# Altium PCB TASK1.2_PCB.PcbDoc
Units mil, origin at the board's own origin, x right, y up, seen from the top; angles counter-clockwise.
Board outline 1500 x 568 mil, 2 copper layers (Top Layer, Bottom Layer); 21 components, 9 nets, 40 pads, 146 vias.
Unrouted connection lines stored in the file: 8.
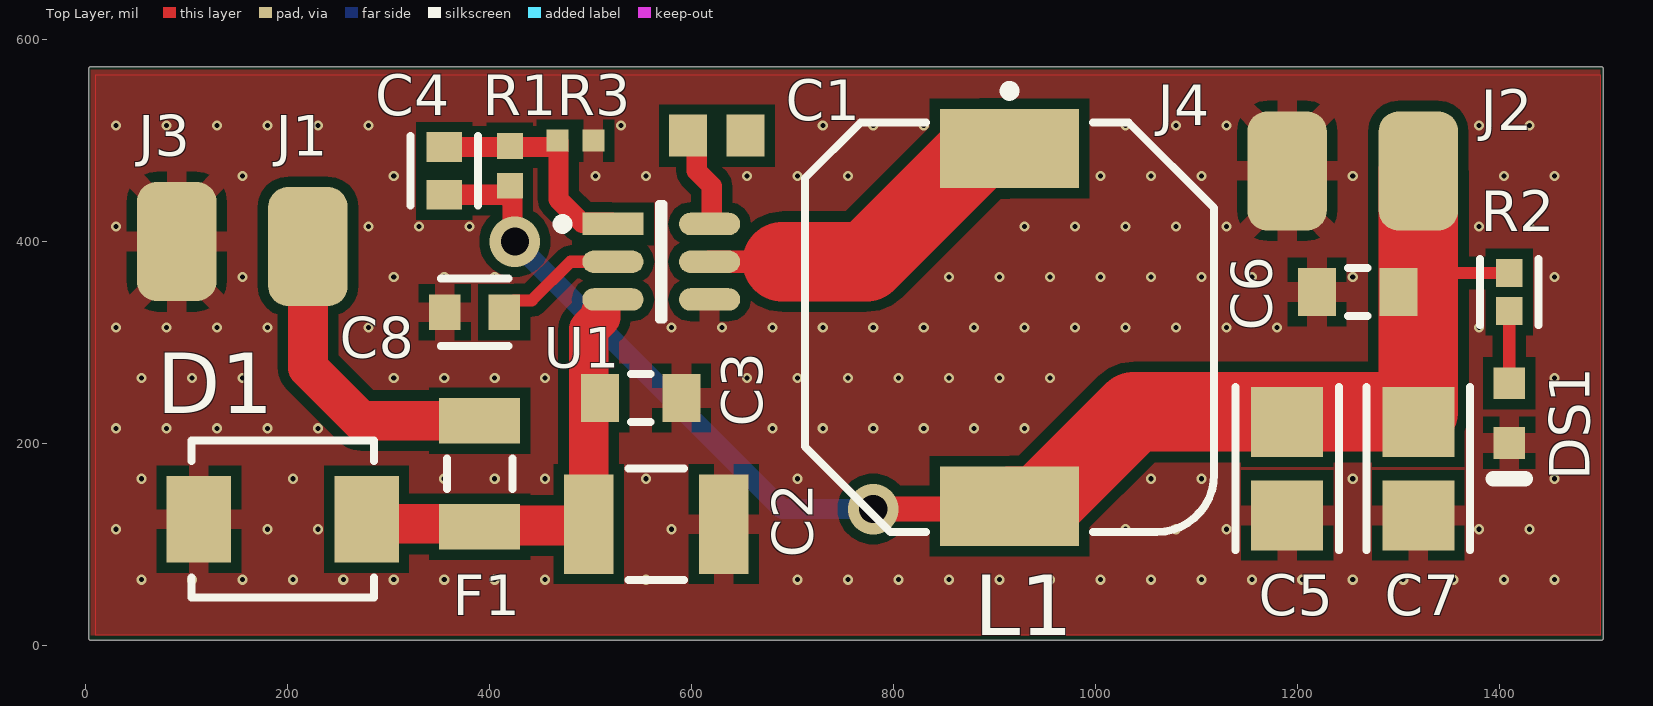
[diagram p0: Top Layer view]
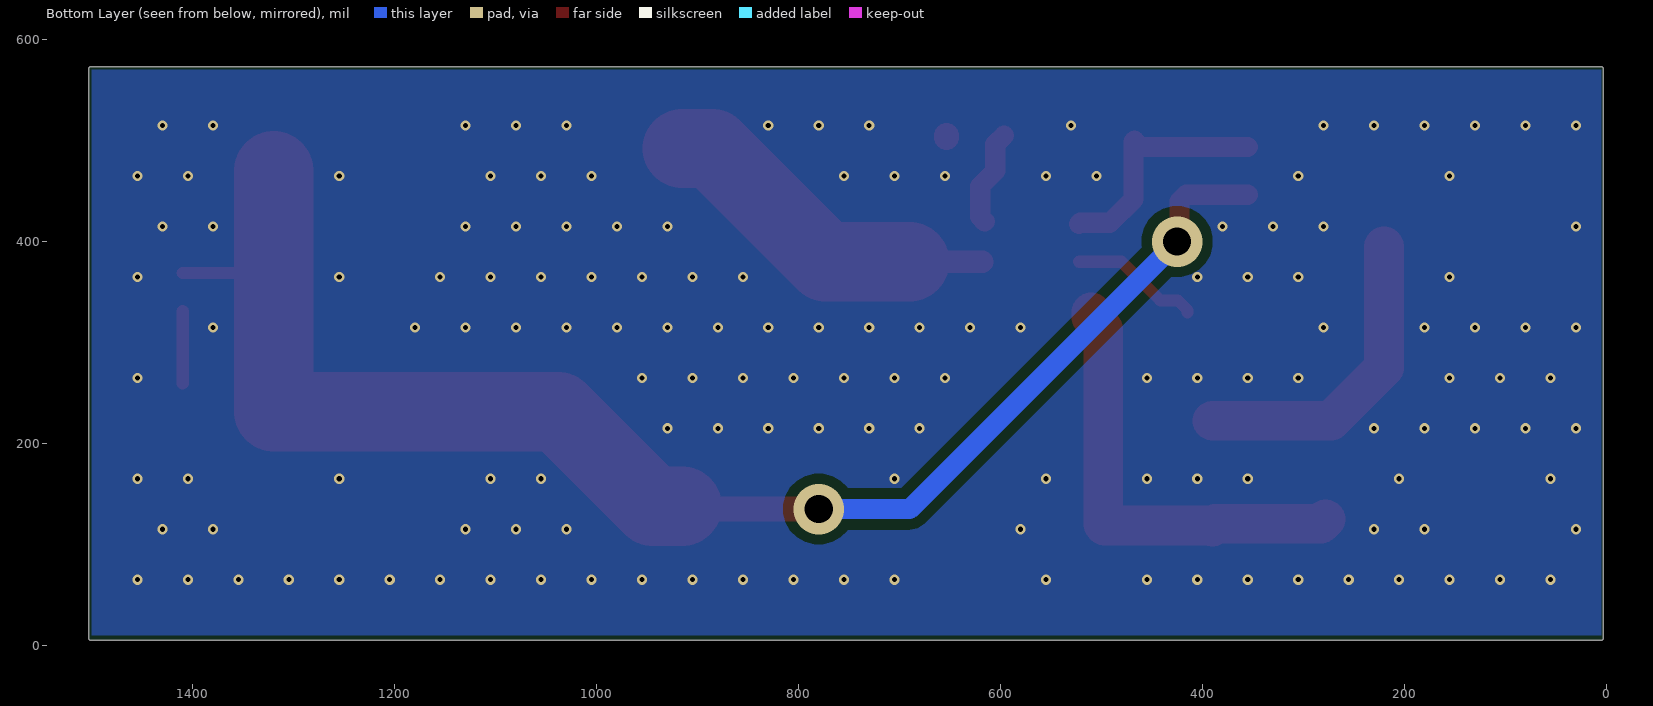
[diagram p1: Bottom Layer view, seen from below]
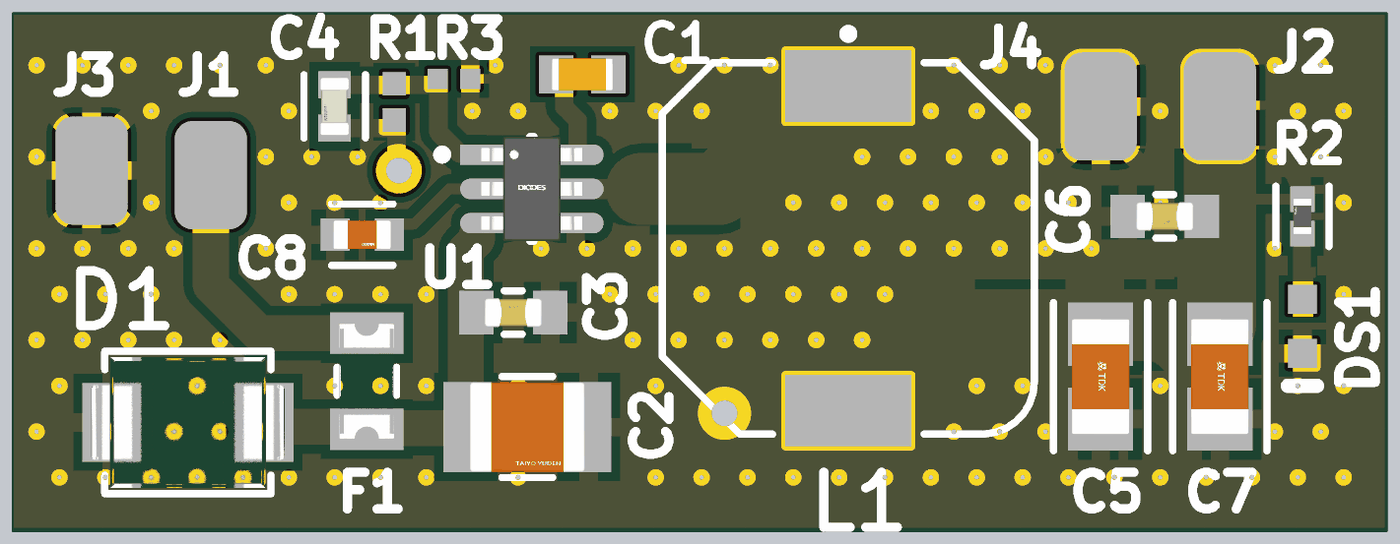
[diagram p2: 3D render of the assembled board from above, using the file's embedded part models]

## Layer stack, top to bottom
Top Solder: solder mask 0.4, Solder Resist, Dk 3.5
Top Layer: signal copper 1.4
Dielectric 1: dielectric 12.6, FR-4, Dk 4.8
Bottom Layer: signal copper 1.4
Bottom Solder: solder mask 0.4, Solder Resist, Dk 3.5

## Board outline
3,6 3,572 4,573 1502,573 1503,572 1503,6 1502,5 4,5

## Design rules (kind name [scope] priority, off if disabled: settings)
AssemblyTestPointUsage [All] p1: isadvanced=TRUE
AssemblyTestpoint [All] p1: isadvanced=TRUE testpointundercomponent=TRUE minsize=40 maxsize=100 preferedsize=60 minholesize=0 maxholesize=40 preferedholesize=32 testpointgrid=1 usegrid=TRUE gridtolerance=0.01 allowsidetop=TRUE allowsidebottom=TRUE
Clearance Clearance_1 [OnMid vs OnMid] p1: gap=10 ignorepadtopadclearanceinfootprint=FALSE sourcerule=39 cellrowname=All cellrowtype=0 cellcolname=All cellcoltype=0 innerlayers=TRUE
Clearance Clearance_2 [(ExistsOnLayer('Top Layer') Or ExistsOnLayer('Bottom Layer')) vs (ExistsOnLayer('Top Layer') Or ExistsOnLayer('Bottom Layer'))] p2: gap=10 ignorepadtopadclearanceinfootprint=FALSE sourcerule=39 cellrowname=All cellrowtype=0 cellcolname=All cellcoltype=0 outerlayers=TRUE
Clearance [All] p3: gap=10 ignorepadtopadclearanceinfootprint=FALSE ismatrix=TRUE
ComponentClearance [All] p1: isadvanced=TRUE gap=10 collisioncheckmode=3 verticalgap=10 showdistances=FALSE
FabricationTestPointUsage [All] p1: isadvanced=TRUE valid=0 allowmultiple=FALSE
FabricationTestpoint [All] p1: isadvanced=TRUE side=3 testpointundercomponent=TRUE minsize=40 maxsize=100 preferedsize=60 minholesize=0 maxholesize=40 preferedholesize=32 testpointgrid=1 allowsidetop=TRUE allowsidebottom=TRUE usegrid=TRUE gridtolerance=0.01
FanoutControl Fanout_BGA [IsBGA] p1: isadvanced=TRUE bgadir=Out bgaviamode=Centered fanoutstyle=Auto fanoutdirection=Alternating viagrid=1 // Fanout_BGA (Default Rule)
FanoutControl Fanout_LCC [IsLCC] p2: isadvanced=TRUE bgadir=Out bgaviamode=Centered fanoutstyle=Auto fanoutdirection=Alternating viagrid=1 // Fanout_LCC (Default Rule)
FanoutControl Fanout_SOIC [IsSOIC] p3: isadvanced=TRUE bgadir=Out bgaviamode=Centered fanoutstyle=Auto fanoutdirection=Alternating viagrid=1 // Fanout_SOIC (Default Rule)
FanoutControl Fanout_Small [(CompPinCount < 5)] p4: isadvanced=TRUE bgadir=Out bgaviamode=Centered fanoutstyle=Auto fanoutdirection=OutThenIn viagrid=1 // Fanout_Small (Default Rule)
FanoutControl Fanout_Default [All] p5: isadvanced=TRUE bgadir=Out bgaviamode=Centered fanoutstyle=Auto fanoutdirection=Alternating viagrid=1 // Fanout_Default (Default Rule)
Height [All] p1: isadvanced=TRUE minheight=0 maxheight=1000 prefheight=500
HoleSize [All] p1: isadvanced=TRUE absolutevalues=TRUE maxlimit=100 minlimit=1 maxpercent=80.000 minpercent=20.000
HoleToHoleClearance [All] p1: isadvanced=TRUE gap=10 allowstackedmicrovias=TRUE
LayerPairs [All] p1: isadvanced=TRUE enforce=TRUE
MinimumSolderMaskSliver [All] p1: isadvanced=TRUE minsoldermaskwidth=10
NetAntennae [All] p1: isadvanced=TRUE netantennaetolerance=0
PasteMaskExpansion [All] p1: isadvanced=TRUE expansion=0
PlaneClearance [All] p1: isadvanced=TRUE clearance=18
PlaneConnect [All] p1: isadvanced=TRUE planeconnectstyle=Relief reliefexpansion=20 reliefentries=4 reliefconductorwidth=10 reliefairgap=10
PolygonConnect PolygonConnectStyle_1 [InNet('NetC4_1')] p1: thpad.connectstyle=Direct thpad.reliefconductorwidth=20 thpad.reliefentries=4 thpad.polygonreliefangle="90 Angle" thpad.airgapwidth=15 smdpad.connectstyle=Direct smdpad.reliefconductorwidth=20 smdpad.reliefentries=4 smdpad.polygonreliefangle="90 Angle" smdpad.airgapwidth=10 via.connectstyle=Relief via.reliefconductorwidth=20 via.reliefentries=4 via.polygonreliefangle="90 Angle" via.airgapwidth=5
PolygonConnect PolygonConnectStyle_2 [InNet('GND')] p2: thpad.connectstyle=Relief thpad.reliefconductorwidth=20 thpad.reliefentries=4 thpad.polygonreliefangle="90 Angle" thpad.airgapwidth=15 smdpad.connectstyle=Relief smdpad.reliefconductorwidth=20 smdpad.reliefentries=4 smdpad.polygonreliefangle="90 Angle" smdpad.airgapwidth=10 smdpad.conductorbypadedge=TRUE smdpad.mindistance=15 smdpad.enablemindistance=FALSE via.connectstyle=Direct via.reliefconductorwidth=20 via.reliefentries=4 via.polygonreliefangle="90 Angle" via.airgapwidth=5
PolygonConnect [All] p3: thpad.connectstyle=Relief thpad.reliefconductorwidth=20 thpad.reliefentries=4 thpad.polygonreliefangle="90 Angle" thpad.airgapwidth=15 smdpad.connectstyle=Relief smdpad.reliefconductorwidth=20 smdpad.reliefentries=4 smdpad.polygonreliefangle="90 Angle" smdpad.airgapwidth=10 via.connectstyle=Relief via.reliefconductorwidth=20 via.reliefentries=4 via.polygonreliefangle="90 Angle" via.airgapwidth=5
RoutingCorners [All] p1: isadvanced=TRUE cornerstyle=45-Degree minsetback=100 maxsetback=100
RoutingPriority [All] p1: isadvanced=TRUE routingpriority=0
RoutingVias [All] p1: holewidth=28 width=50 viastyle="Through Hole" minholewidth=28 minwidth=50 maxholewidth=28 maxwidth=50
ShortCircuit [All] p1: isadvanced=TRUE allowed=FALSE
SilkToSilkClearance [All] p1: isadvanced=TRUE silktosilkclearance=10
SilkToSolderMaskClearance [IsPad] p1: isadvanced=TRUE minsilkscreentomaskgap=10 clearancetoexposedcopper=TRUE
SolderMaskExpansion [All] p1: isadvanced=TRUE expansion=4 istentingtop=FALSE
SupplyNets "Schematic Supply Nets" [InNet('GND')] p1: isadvanced=TRUE voltage=0.000
UnRoutedNet [All] p1: isadvanced=TRUE
UnpouredPolygon [All] p1: isadvanced=TRUE
Width [All] p1 off: maxlimit=10 minlimit=10 preferedwidth=10
4 further rules are at their usual default settings.

## Classes and differential pairs
component class TASK1.2_SCH: C2 C3 C4 C5 C6 C7 C8 D1 F1 J1 J2 J3 J4 R2 U1

## Components (designator, comment, footprint, x,y, rotation, side; value= is the part's Value field where it differs from the comment)
C1 "100nF 50V X7R" CAPC1608X90X35ML10T15 625,505 r0 top
C2 "10uF 50V X7R" FP-MK325A-MFG 565,120 r0 top
C3 "100n 50V X7R" FP-CGA3E-0_3-0_1-IPC_A 549.65,245 r0 top
C4 "56pF 50V C0G" FP-C0603C-CF-MFG 355,470 r90 top value="56 pF"
C5 "22uF 25V X5R" FP-C3216-160-0_2-IPC_B 1190,175 r270 top
C6 "100n 50V X7R" FP-CGA3E-0_3-0_1-IPC_A 1260,350 r180 top
C7 "22uF 25V X5R" FP-C3216-160-0_2-IPC_B 1320,175 r270 top
C8 "22nF 50V X7R" FP-CC0603-DA-MFG 385,330 r180 top
D1 "SMBJ33CA-TR" FP-SMB-CA-MFG 195,125 r0 top
DS1 "HSMS-C190" AVAG-HSMX-C190_V 1410,230 r270 top
F1 "0468001.NR" FP-0468-MFG 390,170 r270 top value=0.079Ω
J1 "" "SMD PAD 3x2mm" 240,425 r180 top
J2 "" "SMD PAD 3x2mm" 1340,500 r180 top
J3 "" "SMD PAD 3x2mm" 70,370 r0 top
J4 "" "SMD PAD 3x2mm" 1210,500 r180 top
L1 "7447714068" WE-PD_1050P 915,315 r0 top
R1 "158k 1%" RESC1005X40X25ML05T05 420,475 r270 top
R2 "1k 1%" FP-RC0402-0_4-IPC_A 1410,350 r90 top
R3 "30.1k 1%" RESC1005X35X20NL05T10 485,500 r180 top
U1 "AP63300WU-7" FP-TSOT26-IPC_A 570,380 r0 top
? "Comment" PCBComponent_1 585,-265 r0 top

## Footprints (in the part's own frame and the unit in brackets; to place one, negate y for a bottom-side part, rotate by r counter-clockwise, add the part's x,y. Pads: shape width x height; smd on the part's side, far side on the other; paste and mask are expansions set on the pad)
AVAG-HSMX-C190_V [mm] "SMD, 2-Leads, Body 1.6x0.8mm, Height 0.9mm"
  rect 0.8x0.8 smd: 1(-0.75,0) 2(0.75,0)
  silkscreen extent 1.65,-0.4 1.65,0.4, body extent -0.8,-0.4 0.8,0.4, height 0.9
CAPC1608X90X35ML10T15 [mm] "Chip Capacitor, 2-Leads, Body 1.7x0.9mm, IPC Low Density"
  rect 0.95x1.05 smd: 1(-0.725,0) 2(0.725,0)
  body extent -0.85,-0.45 0.85,0.45, height 0.9
FP-0468-MFG [mil]
  rect 45x80 smd paste+0 mask+0: 1(-52.5,0) 2(52.5,0)
  silkscreen extent -15,-32 15,32, body extent -79,-44 79,44, height 10
FP-C0603C-CF-MFG [mm]
  rect 0.75x0.9 smd paste+0 mask+0: 1(-0.6,0) 2(0.6,0)
  silkscreen extent -0.87,-0.85 0.88,0.85, body extent -1.2,-0.6 1.2,0.6, height 0.25
FP-C3216-160-0_2-IPC_B [mil]
  rect 69.05x71.11 smd paste+0 mask+0: 1(-46.3,0) 2(46.3,0)
  silkscreen extent -81,-51 81,51, body extent -91,-45 91,45, height 10
FP-CC0603-DA-MFG [mm]
  rect 0.8x0.9 smd paste+0 mask+0: 1(-0.75,0) 2(0.75,0)
  silkscreen extent -0.85,-0.85 0.85,0.85, body extent -1.43,-0.82 1.43,0.82, height 0.25
FP-CGA3E-0_3-0_1-IPC_A [mm]
  rect 0.956x1.206 smd paste+0 mask+0: 1(-1.025,0) 2(1.025,0)
  silkscreen extent -0.25,-0.6 0.25,0.6, body extent -2,-1.1 2,1.1, height 0.25
FP-MK325A-MFG [mm]
  rect 1.25x2.5 smd paste+0 mask+0: 1(-1.7,0) 2(1.7,0)
  silkscreen extent -0.7,-1.4 0.7,1.4, body extent -2.42,-1.5 2.42,1.5, height 0.25
FP-RC0402-0_4-IPC_A [mil]
  rect 28.16x26.48 smd paste+0 mask+0: 1(-18.84,0) 2(18.84,0)
  silkscreen extent -33,-29 33,29, body extent -41,-21 41,21, height 10
FP-SMB-CA-MFG [mm]
  rect 1.62x2.18 smd paste+0 mask+0: 1(-2.11,0) 2(2.11,0)
  silkscreen extent -2.3,-1.98 2.3,1.98, body extent -3.02,-2.07 3.02,2.07, height 0.25
FP-TSOT26-IPC_A [mm]
  rect 1.54x0.566 smd paste+0 mask+0: 1(-1.215,0.95)
  rrect100% 1.54x0.566 smd paste+0 mask+0: 2(-1.215,0) 3(-1.215,-0.95) 4(1.215,-0.95) 5(1.215,0) 6(1.215,0.95)
  silkscreen extent -2.61,-1.45 0.05,1.45, body extent -2.49,-1.95 2.49,1.95, height 0.25
PCBComponent_1 [mil]
RESC1005X35X20NL05T10 [mm] "Chip Resistor, 2-Leads, Body 1.00x0.50mm, IPC Medium Density"
  rect 0.55x0.55 smd: 1(-0.45,0) 2(0.45,0)
  body extent -0.53,-0.27 0.53,0.28, height 0.35
RESC1005X40X25ML05T05 [mm] "Chip Resistor, 2-Leads, Body 1.00x0.50mm, IPC Low Density"
  rect 0.65x0.65 smd: 1(-0.5,0) 2(0.5,0)
  body extent -0.53,-0.27 0.53,0.28, height 0.4
"SMD PAD 3x2mm" [mil]
  rrect50% 78.74x118.11 smd: A1(20,30)
WE-PD_1050P [mm] "SMD Shielded Power Inductor, 2-leads, body 10x10mm"
  rect 3.5x2 smd: 1(0,4.5) 2(0,-4.5)
  silkscreen extent -5.15,-5.15 5.15,6.07

## Part data
C1: library part CMP-2100-03643-1, "Chip Capacitor, 0.1 uF, +/- 10%, 50 V, -55 to 125 degC, 0603 (1608 Metric), RoHS, Tape and Reel", Capacitance=100nF, Case Code (Imperial)=0603, Case Code (Metric)=1608, Dielectric=X7R, Dielectric Material=Ceramic, Insulation Resistance=10GR, Manufacturer=Murata, Max Operating Temperature=125degC, Min Operating Temperature=-55degC, Package Description="2-Pin Surface Mount Device, Body 1.6 x 0.8 mm", Package Quantity=1, Tolerance=10%, Voltage=50V, Case/Package=0603, Contact Plating=Tin, Datasheet URL=http://psearch.en.murata.com/capacitor/product/GRM188R71H104KA93%23.pdf, Datasheet Version=42675.0, Depth=0.8mm, Height=0.8mm, Lead Free=LeadFree, Length=1.6mm, Manufacturer URL=http://www.murata.com/, Material=Ceramic, Mount=SurfaceMount, Number of Pins=2, Package Reference=0603, Packaging=TapeandReel, Radiation Hardening=No, REACH SVHC=NoSVHC, RoHSCompliant=true, Termination=SMD/SMT, Thickness=0.035inch, Voltage Rating=50V, Voltage Rating (DC)=50V, Width=0.8mm
C2: library part CMP-14477-002214-1, "CAP CER 10UF 50V X7R 1210", Capacitance=10uF, Case Code (Imperial)=1210, Case Code (Metric)=3225, Max Operating Temperature=125°C, Min Operating Temperature=-55°C, Package Quantity=500, Tolerance=10%, Voltage Rating=50V, Case/Package=1210, Halogen Free="Halogen Free", Lead Free="Lead Free", Length=0.126inch, Mount="Surface Mount", Packaging="Tape and Reel", RoHS Compliant=Yes, Series=M, Termination=SMD/SMT, Thickness=0.11inch, Voltage Rating (DC)=50V, Width=0.098inch
C3 C6: library part CMP-2000-07546-2, "Cap Ceramic 100nF 50V X7R 10% Pad SMD 0603 +125°C Automotive T/R", Capacitance=100nF, Case Code (Imperial)=0603, Case Code (Metric)=1608, Dielectric=X7R, Max Operating Temperature=125°C, Min Operating Temperature=-55°C, Package Quantity=1, Ratings=AEC-Q200, Tolerance=10%, Voltage=50V, Case/Package=0603, Composition=Ceramic, Depth=0.8mm, Height=0.8mm, Lead Free="Lead Free", Length=1.6mm, Mount="Surface Mount", Packaging="Tape and Reel", Radiation Hardening=No, REACH SVHC="No SVHC", Termination=SMD/SMT, Thickness=0.035inch, Voltage Rating=50V, Voltage Rating (DC)=50V, Weight=7.1E-05oz, Width=0.8mm
C4: library part CMP-2006-03385-2, "CAP CER 56PF 50V 1% NP0 0603", Capacitance="56 pF", Manufacturer=KEMET, Manufacturer Part Number=C0603C560F5GACTU, Package=C0603C-CF, Temperature="-55°C to +125°C", Temperature Characteristic=C0G, Temperature Coefficient=30ppm/°C, Temperature Range High=+125°C, Temperature Range Low=-55°C, Tolerance=0.01, Voltage Rating="50 V", Automotive=Yes, Automotive Grade="Grade 1", Category=Cap, ComponentLink2Description=Datasheet, ComponentLink2URL=https://api.kemet.com/component-edge/download/datasheet/C0603C100J5GACAUTO.pdf, Device Class L1="Passive Components", Device Class L2=Capacitors, Device Class L3="Ceramic Capacitors", Digikey Description="CAP CER 56PF 50V 1% NP0 0603", Height=0.87mm, Lead Free=Yes, Material=Ceramic, Mouser Description="Multilayer Ceramic Capacitors MLCC - SMD/SMT 50volts 56pF C0G 1%", Octopart=https://octopart.com/c0603c560f5gactu-kemet-9143760, RoHS=TRUE
C5 C7: library part CMP-08246-004697-1, "Multilayer Ceramic Capacitors 22uF ±20% 25V X5R SMD 1206", Capacitance=22uF, Case Code (Imperial)=1206, Case Code (Metric)=3216, Dielectric=X5R, Dielectric Material=Ceramic, Max Operating Temperature=85°C, Min Operating Temperature=-55°C, Package Quantity=1, Tolerance=20%, Voltage Rating=25V, Case/Package=1206, Construction=Flat, Depth=1.6mm, Height=1.6mm, Lead Free="Lead Free", Length=3.2mm, Mount="Surface Mount", Packaging="Tape and Reel", REACH SVHC="No SVHC", Resistor Type=Ceramic, RoHS Compliant=Yes, Series=C, Termination=SMD/SMT, Thickness=0.071inch, Voltage Rating (DC)=25V, Weight=0.000571oz, Width=0.063inch
C8: library part CMP-2100-03602-3, "CAP CER 0.022UF 50V X7R 0603", Capacitance=22nF, Case Code (Imperial)=0603, Case Code (Metric)=1608, Dielectric=X7R, Dielectric Material=Ceramic, Insulation Resistance=100GR, Max Operating Temperature=125°C, Min Operating Temperature=-55°C, Package Quantity=1, Tolerance=10%, Voltage=50V, Case/Package=0603, Depth=0.8mm, Halogen Free="Halogen Free", Height=0.8mm, Lead Free="Lead Free", Length=1.6mm, Mount="Surface Mount", Number of Pins=2, Packaging="Tape and Reel", Radiation Hardening=No, REACH SVHC="No SVHC", Resistor Type=Ceramic, RoHS Compliant=Yes, Series=CC, Termination=SMD/SMT, Thickness=0.035inch, Voltage Rating=50V, Voltage Rating (DC)=50V, Width=0.031inch
D1: library part CMP-12225-000040-1, "TVS DIODE 33V 69.7V SMB", Breakdown Voltage=36.7V, Clamping Voltage=53.3V, Manufacturer=STMicroelectronics, Max Junction Temp=+150°C, Package=SMB-CA, Peak Pulse Current=11.8A, Peak Pulse Power=600W, Reverse Standoff Voltage=33V, Temperature="-55°C to +150°C", Temperature Range Low=-55°C, Automotive=No, Category=Diode, ComponentLink2Description=Datasheet, ComponentLink2URL=https://www.st.com/resource/en/datasheet/smbj.pdf, Device Class L1="Circuit Protection", Device Class L2="TVS Diodes", Device Class L3=unset, Digikey Description="TVS DIODE 33V 69.7V SMB", Direction=Bidirectional, Height=2.65mm, Lead Free=Yes, Manufacturer Part Number=SMBJ33CA-TR, Mouser Description="TVS Diodes - Transient Voltage Suppressors 600W 33V Bidirect", Number Of Channels=1, Octopart=https://octopart.com/smbj33ca-tr-stmicroelectronics-347069, RoHS=TRUE, Standoff Height=0.05mm, Temperature Range High=+150°C
DS1: library part CMP-2000-06427-1, "LED Uni-Color Red, 52 mW, 20 mA, -40 to 85 degC, 2-Pin SMD, RoHS, Tape and Reel", Emitting Color=Red, Forward Current=25mA, Forward Voltage=2.6V, Manufacturer=Avago, Operating Temp Range=-40Cto85C, Operating Temperature Classification=Industrial, Package Description="2-Pin Surface Mount Device, Body 1.6 x 0.8 mm, Height 0.9 mm", Package Reference=HSMX-C190, Package Type=ChipLed, Power Dissipation=52W, Reverse Voltage=5V, Test Current (It)=20mA, Chip Material=GaP, Datasheet URL=http://docs.avagotech.com/docs/AV02-0551EN, Datasheet Version=03/2012, DELETED=Compliant, Dominant Wave Length=626nm, High Brightness=No, Lens Dimensions=1x0.8x0.5mm, Lens Type=ColorlessDiffused, Lum Intensity=10mcd, Luminous Intensity=10mcd, Main Category=ChipLED, Manufacturer URL=http://www.avagotech.com/, Mounting=SurfaceMount, Mounting Technology=SurfaceMount, Number of  Elements=1, Packaging=TapeandReel, Peak Wavelength=630nm, Pin Count=2, Product Depth (mm)=0.8mm, Product Height (mm)=0.8mm, Product Length (mm)=1.6mm, Rad Hardened=No, Shape Type=Rectangular, Type=Uni-Color, Viewing Angle=170deg
F1: library part CMP-2000-05753-2, "FUSE BOARD MNT 1A 63VAC/VDC 1206", Fuse Current=1A, Fuse Interrupt Ac Current=50A, Fuse Voltage Drop=94.7mV, Manufacturer=Littelfuse, Max Fuse Ac Voltage=63V, Package=0468, Resistance=0.079Ω, Temperature="-55°C to +90°C", Temperature Range High=+90°C, Temperature Range Low=-55°C, Automotive=No, Category=Fuse, ComponentLink2Description=Datasheet, ComponentLink2URL=https://m.littelfuse.com/~/media/electronics/datasheets/fuses/littelfuse_fuse_468_datasheet.pdf.pdf, Device Class L1="Circuit Protection", Device Class L2=Fuses, Device Class L3=unset, Digikey Description="FUSE BOARD MNT 1A 63VAC/VDC 1206", Fuse Blow Speed=Slow, Fuse I2T=0.127A2Sec, Fuse Interrupt Dc Current=50A, Height=0.762mm, Lead Free=Yes, Manufacturer Part Number=0468001.NR, Max Fuse Dc Voltage=63V, Mouser Description="Surface Mount Fuses 1A Slo-Blo", Octopart=https://octopart.com/0468001.nr-littelfuse-566477, RoHS=TRUE, Voltage Rating=63V
J1 J2 J3 J4: library part Component_2
L1: library part CMP-1396-00028-2, Ambient Temperature Range High=110°C, Ambient Temperature Range Low=-40°C, Case/Package=Nonstandard, Current Rating=5.2A, DC Resistance (DCR)=18.5mΩ, Inductance=6.8µH, Inductance Tolerance=30%, Max Operating Temperature=150°C, Resistance=22mΩ, Saturation Current=5.8A, Self Resonant Frequency=23.5MHz, Test Frequency=100kHz, Composition=Wirewound, Core Material=Ferrite, Depth=10mm, Height=5mm, Height - Seated (Max)=5.0038mm, Length=10mm, Max DC Current=5.2A, Min Operating Temperature=-40°C, Mount="Surface Mount", NexarPartId=24533296, Number of Pins=2, Packaging=Digi-Reel®, REACH SVHC=Unknown, RMS Current (Irms)=5.2A, RoHS=Compliant, Series Resistance=22mΩ, Shielding=Shielded, Termination=SMD/SMT, Tolerance=30%, Width=10mm
R1: library part CMP-2002-00703-1, Manufacturer=Panasonic, Part Number=ERJ-2RKF1583X
R2: library part CMP-2002-07472-3, "RES 1K OHM 1% 1/16W 0402", Case Code (Imperial)=0402, Case Code (Metric)=1005, Max Operating Temperature=155°C, Max Power Dissipation=63mW, Min Operating Temperature=-55°C, Power Rating=62.5mW, Resistance=1kR, Resistance Tolerance=1%, Resistor Type="Thick Film", Temperature Coefficient=100ppm/°C, Voltage Rating=50V, Case/Package=0402, Construction=Rectangular, Depth=0.5mm, Features="Moisture Resistant", Height=0.32mm, Lead Free="Lead Free", Length=1mm, Military Standard=Not, Number of Pins=2, Number of Terminations=2, Packaging="Tape and Reel", Reach SVHC Compliant=Yes, RoHS Compliant=Yes, Series=RC, Size Code=0402, Technology="THICK FILM", Termination=SMD/SMT, Tolerance=1%, Voltage Rating (DC)=50V, Width=0.5mm
R3: library part CMP-2002-03252-1, Manufacturer="TE Connectivity / AMP", Part Number=CPF0402B30K1E1
U1: library part CMP-12757-000025-1, "DCDC CONV HV BUCK TSOT26"

## Via types
v1: diameter 10, hole 5, Top Layer to Bottom Layer, 144 vias
v2: diameter 50, hole 28, Top Layer to Bottom Layer, 2 vias

## Nets (pads, with @x,y where several pads share a name; then routed paths per layer and width w, separated by ;. In a path a pad name is that pad's centre, name@x,y a point inside that pad or via, vN(x,y) a via of type N, cw(c..) or ccw(c..) an arc to the next point about the centre after c; other vN are vias at no path point)
GND: C2.2 C3.2 C5.2 C6.2 C7.2 C8.2 D1.1 DS1.2 J3.A1 J4.A1 R3.1 U1.4
  other v1: 55,65 105,65 155,65 205,65 255,65 305,65 355,65 405,65 455,65 555,65 705,65 755,65 805,65 855,65 905,65 955,65 1005,65 1055,65 1105,65 1155,65 1205,65 1255,65 1305,65 1355,65 1405,65 1455,65 30,115 180,115 230,115 580,115 1030,115 1080,115 1130,115 1380,115 1430,115 55,165 205,165 355,165 405,165 455,165 555,165 705,165 1055,165 1105,165 1255,165 1405,165 1455,165 30,215 80,215 130,215 180,215 230,215 680,215 730,215 780,215 830,215 880,215 930,215 55,265 105,265 155,265 305,265 355,265 405,265 455,265 655,265 705,265 755,265 805,265 855,265 905,265 955,265 1455,265 30,315 80,315 130,315 180,315 280,315 580,315 630,315 680,315 730,315 780,315 830,315 880,315 930,315 980,315 1030,315 1080,315 1130,315 1180,315 1380,315 155,365 305,365 355,365 405,365 855,365 905,365 955,365 1005,365 1055,365 1105,365 1155,365 1255,365 1455,365 30,415 280,415 330,415 380,415 930,415 980,415 1030,415 1080,415 1130,415 1380,415 1430,415 155,465 305,465 505,465 555,465 655,465 705,465 755,465 1005,465 1055,465 1105,465 1255,465 1405,465 1455,465 30,515 80,515 130,515 180,515 230,515 280,515 530,515 730,515 780,515 830,515 1030,515 1080,515 1130,515 1380,515 1430,515
NetC1_1: C1.1 U1.6 | length 100.2
  Top Layer w12: U1.6@615.49,419.77 U1.6
  Top Layer w20: C1.1 605.16,496.3 605.16,469.84 620,455 620,424.28 U1.6@615.49,419.77
NetC1_2: C1.2 L1.1 U1.5 | length 330.9
  Top Layer w22: U1.5 675.33,380
  Top Layer w25: C1.2@653.54,503.03 C1.2
  Top Layer w78.74: 690,380 773.31,380 885.47,492.17 L1.1
NetC2_1: C2.1 C3.1 D1.2 F1.2 U1.3 | length 439.1
  Top Layer w39.37: D1.2 282.76,120.31 387.19,120.31 F1.2 391.25,118.75 496.82,118.75 C2.1 498.07,313.07 510,325 510,330
NetC4_1: C4.1 C5.1 C6.1 C7.1 J2.A1 L1.2 R1.2 R2.2 | length 1485
  Top Layer w12: 1320,370 1321.16,368.84 R2.2
  Top Layer w20: C4.1 416.12,446.38 422.5,440 422.5,402.5 v2(425,400)
  Top Layer w25: v2(780,135) 912.17,135 L1.2
  Top Layer w78.74: L1.2 944.53,137.83 1038,231.3 1320,231.3 1320,370 J2.A1
  Bottom Layer w20: v2(425,400) 690,135 v2(780,135)
NetC4_2: C4.2 R1.1 R3.2 U1.1 | length 238.3
  Top Layer w10: C4.2 C4.2@355.53,494.15
  Top Layer w20: C4.2 420,493.62 460.9,493.62 R3.2 468.11,499.17 468.11,441.89 491.46,418.54 521.01,418.54 U1.1
NetC8_1: C8.1 U1.2 | length 129.5
  Top Layer w12: C8.1 414.53,331.97 424.28,341.72 441.72,341.72 480,380 U1.2
NetDS1_1: DS1.1 R2.1 | length 71.6
  Top Layer w12: DS1.1 R2.1
NetF1_1: F1.1 J1.A1 | length 311.7
  Top Layer w39.37: J1.A1 220,275 272.5,222.5 F1.1

## Polygon pours and split planes (outlines as drawn)
GND on Top Layer "GND_L01_P001" (solid, pour order 1): 5,570 5,10 1500,10 1500,570
GND on Top Layer "NONET_L01_P000" (solid, shelved, pour order 0): 10,565 1500,565 1500,10 10,10
GND on Bottom Layer "GND_L02_P002" (solid, pour order 2): 5,10 1500,10 1500,570 5,570

## Silkscreen, mask and mechanical layers (free items; w line width, h text height)
Mechanical 1:
  the board outline again, w10